# Altium PCB VGA.PcbDoc
Units mm, origin at the board's own origin, x right, y up, seen from the top; angles counter-clockwise.
Board outline 64.75 x 22.5 mm, 2 copper layers (Top Layer, Bottom Layer); 41 components, 26 nets, 139 pads, 0 vias.
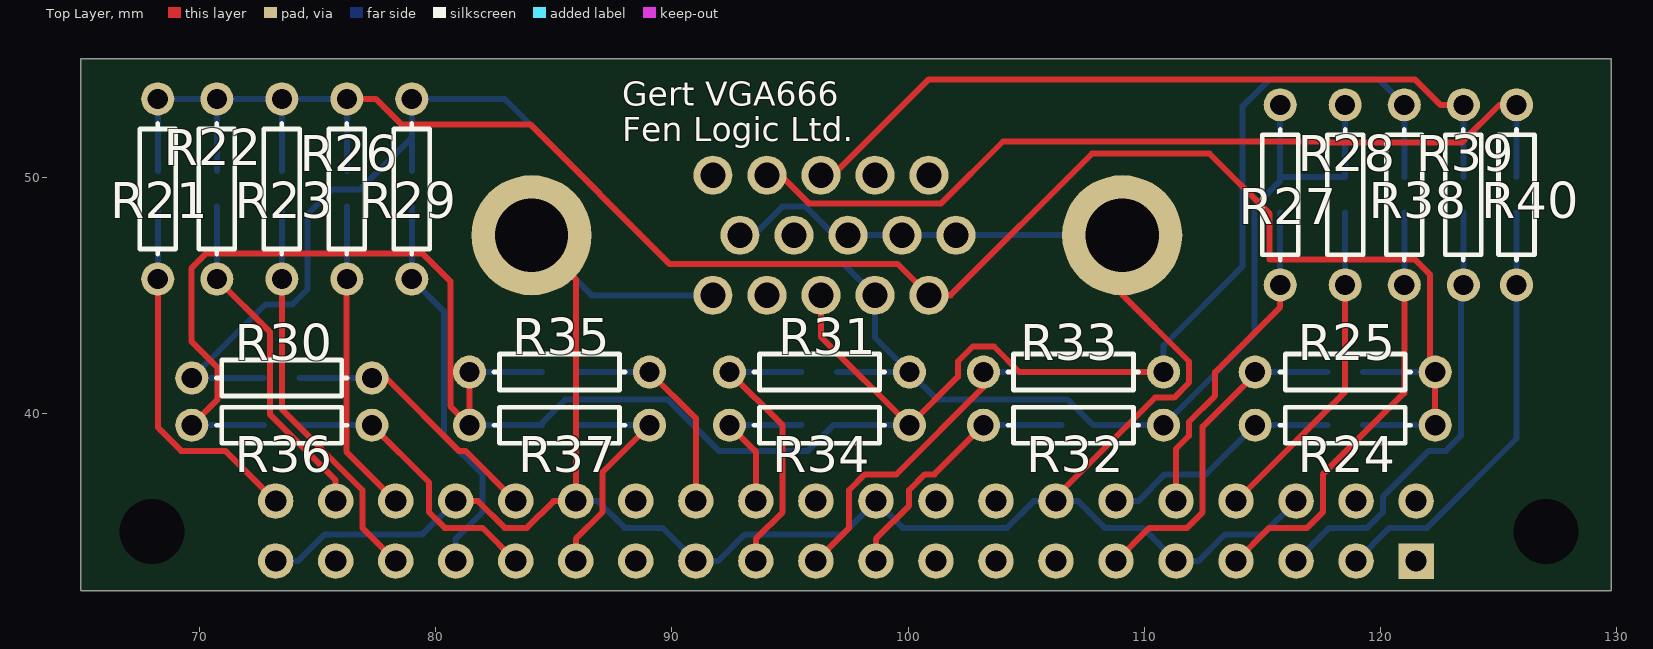
[diagram p0: Top Layer view]
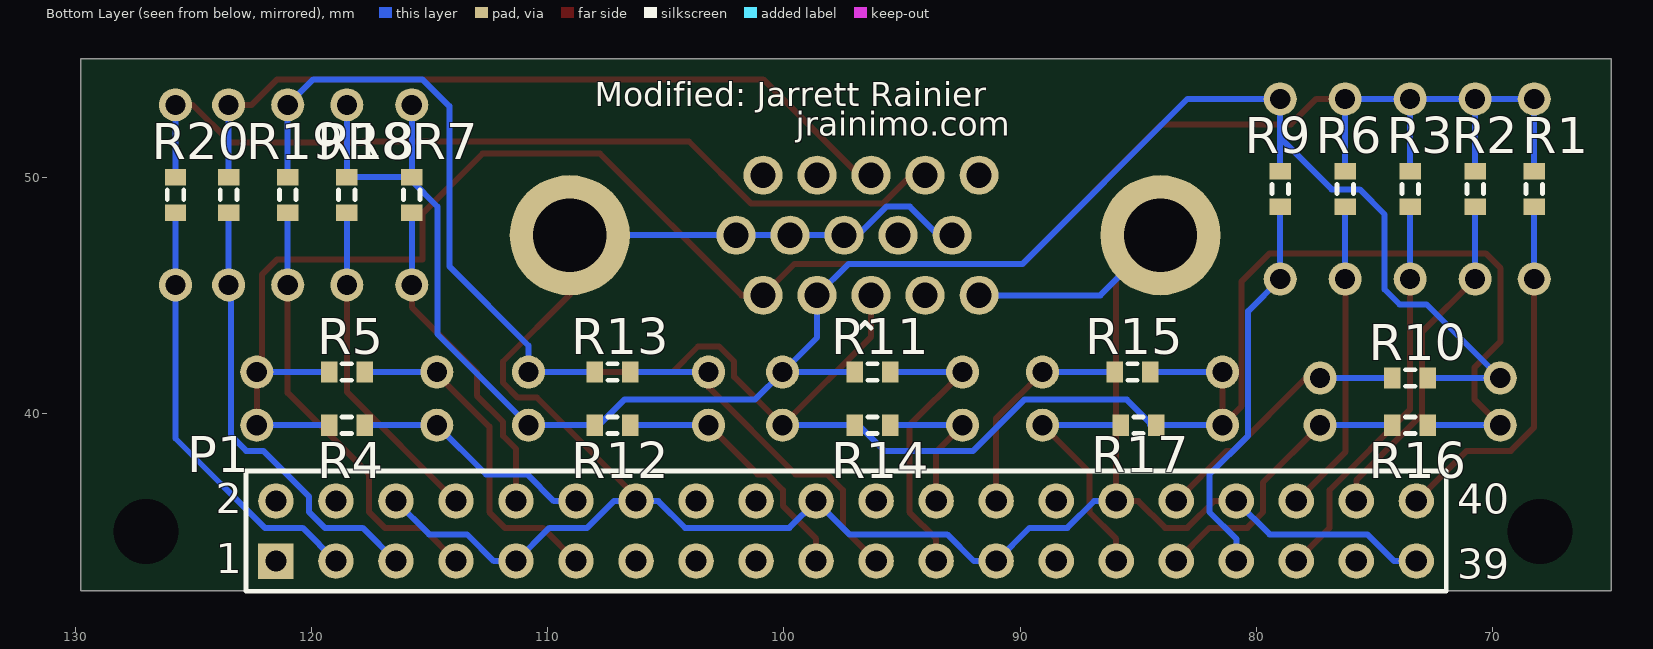
[diagram p1: Bottom Layer view, seen from below]

## Layer stack, top to bottom
Top Layer: signal copper 0.0356
Dielectric: dielectric 0.32, FR-4, Dk 4.8
Bottom Layer: signal copper 0.0356

## Board outline
65,32.5 65,55 129.75,55 129.75,32.5

## Design rules (kind name [scope] priority, off if disabled: settings)
Clearance [All] p1: gap=0.254
PolygonConnect [All] p1: connectstyle=Relief reliefconductorwidth=0.254 reliefentries=4 polygonreliefangle="90 Angle"
RoutingVias [All] p1: holewidth=0.711 width=1.27 viastyle="Through Hole" minholewidth=0.711 minwidth=1.27 maxholewidth=0.711 maxwidth=1.27
SilkscreenOverComponentPads [All] p1: minsilkscreentomaskgap=0.254
SolderMaskExpansion [All] p1: expansion=0.102
Width [All] p1: maxlimit=0.254 minlimit=0.254 preferedwidth=0.254
27 further rules are at their usual default settings.

## Components (designator, comment, footprint, x,y, rotation, side; value= is the part's Value field where it differs from the comment)
P1 "Header 20X2" HDR2X20 121.5,33.75 r180 bottom
R1 "Res3" J1-0603 68.25,49.5 r90 bottom
R2 "Res3" J1-0603 70.75,49.5 r90 bottom
R3 "Res3" J1-0603 73.5,49.5 r90 bottom
R4 "Res3" J1-0603 118.5,39.5 r0 bottom
R5 "Res3" J1-0603 118.5,41.75 r0 bottom
R6 "Res3" J1-0603 76.25,49.5 r90 bottom
R7 "Res3" J1-0603 115.75,49.25 r90 bottom
R8 "Res3" J1-0603 118.5,49.25 r90 bottom
R9 "Res3" J1-0603 79,49.5 r90 bottom
R10 "Res3" J1-0603 73.5,41.5 r180 bottom
R11 "Res3" J1-0603 96.25,41.75 r0 bottom
R12 "Res3" J1-0603 107.25,39.5 r0 bottom
R13 "Res3" J1-0603 107.25,41.75 r0 bottom
R14 "Res3" J1-0603 96.25,39.5 r0 bottom
R15 "Res3" J1-0603 85.25,41.75 r180 bottom
R16 "Res3" J1-0603 73.5,39.5 r180 bottom
R17 "Res3" J1-0603 85,39.5 r180 bottom
R18 "Res3" J1-0603 121,49.25 r90 bottom
R19 "Res3" J1-0603 123.5,49.25 r90 bottom
R20 "Res3" J1-0603 125.75,49.25 r90 bottom
R21 "Res1" AXIAL-0.3 68.25,49.5 r90 top
R22 "Res1" AXIAL-0.3 70.75,49.5 r90 top
R23 "Res1" AXIAL-0.3 73.5,49.5 r90 top
R24 "Res1" AXIAL-0.3 118.5,39.5 r0 top
R25 "Res1" AXIAL-0.3 118.5,41.75 r0 top
R26 "Res1" AXIAL-0.3 76.25,49.5 r90 top
R27 "Res1" AXIAL-0.3 115.75,49.25 r90 top
R28 "Res1" AXIAL-0.3 118.5,49.25 r90 top
R29 "Res1" AXIAL-0.3 79,49.5 r90 top
R30 "Res1" AXIAL-0.3 73.5,41.5 r180 top
R31 "Res1" AXIAL-0.3 96.25,41.75 r0 top
R32 "Res1" AXIAL-0.3 107,39.5 r0 top
R33 "Res1" AXIAL-0.3 107,41.75 r0 top
R34 "Res1" AXIAL-0.3 96.25,39.5 r0 top
R35 "Res1" AXIAL-0.3 85.25,41.75 r180 top
R36 "Res1" AXIAL-0.3 73.5,39.5 r180 top
R37 "Res1" AXIAL-0.3 85.25,39.5 r180 top
R38 "Res1" AXIAL-0.3 121,49.25 r90 top
R39 "Res1" AXIAL-0.3 123.5,49.25 r90 top
R40 "Res1" AXIAL-0.3 125.75,49.25 r90 top

## Footprints (in the part's own frame and the unit in brackets; to place one, negate y for a bottom-side part, rotate by r counter-clockwise, add the part's x,y. Pads: shape width x height; smd on the part's side, far side on the other; paste and mask are expansions set on the pad)
AXIAL-0.3 [mm] "Axial Device, Thru-Hole; 2 Leads; 0.3 in Pin Spacing"
  round 1.4 hole 0.85: 1(-3.81,0) 2(3.81,0)
  silkscreen extent -2.77,-0.76 2.77,0.76
HDR2X20 [mm] "Connector; Header; 20x2 Position"
  rect 1.5x1.5 hole 0.9: 1(0,0)
  round 1.5 hole 0.9: 2(0,2.54) 3(2.54,0) 4(2.54,2.54) 5(5.08,0) 6(5.08,2.54) 7(7.62,0) 8(7.62,2.54) 9(10.16,0) 10(10.16,2.54) 11(12.7,0) 12(12.7,2.54) 13(15.24,0) 14(15.24,2.54) 15(17.78,0) 16(17.78,2.54) 17(20.32,0) 18(20.32,2.54) 19(22.86,0) 20(22.86,2.54) 21(25.4,0) 22(25.4,2.54) 23(27.94,0) 24(27.94,2.54) 25(30.48,0) 26(30.48,2.54) 27(33.02,0) 28(33.02,2.54) 29(35.56,0) 30(35.56,2.54) 31(38.1,0) 32(38.1,2.54) 33(40.64,0) 34(40.64,2.54) 35(43.18,0) 36(43.18,2.54) 37(45.72,0) 38(45.72,2.54) 39(48.26,0) 40(48.26,2.54)
  silkscreen extent -1.27,-1.27 49.53,3.81
J1-0603 [mm] "Chip Resistor, Body 1.6x0.8mm, IPC High Density"
  rect 0.7x0.9 smd: 1(-0.75,0) 2(0.75,0)
  silkscreen extent -0.2,-0.35 0.2,0.35, body extent -0.85,-0.48 0.85,0.48, height 0.9

## Part data
P1: "Header, 20-Pin, Dual row"
R1 R2 R3 R4 R5 R6 R7 R8 R9 R10 R11 R12 R13 R14 R15 R16 R17 R18 R19 R20 R21 R22 R23 R24 R25 R26 R27 R28 R29 R30 R31 R32 R33 R34 R35 R36 R37 R38 R39 R40: "Resistor"

## Free pads (board coordinates)
  round 1.524 hole 2.75: 0(68,35) 0(127,35)
  round 1.651 hole 1.067: 1(100.886,45) 2(98.6,45) 3(96.314,45) 4(94.028,45) 5(91.742,45) 6(102.029,47.54) 7(99.743,47.54) 8(97.457,47.54) 9(95.171,47.54) 10(92.885,47.54) 11(100.886,50.08) 12(98.6,50.08) 13(96.314,50.08) 14(94.028,50.08) 15(91.742,50.08)
  round 5.08 hole 3.099: 16(84.071,47.54) 17(109.065,47.54)

## Nets (pads, with @x,y where several pads share a name; then routed paths per layer and width w, separated by ;. In a path a pad name is that pad's centre, name@x,y a point inside that pad or via, vN(x,y) a via of type N, cw(c..) or ccw(c..) an arc to the next point about the centre after c; other vN are vias at no path point)
BLUE: pad.3 R13.2 R14.2 R15.2 R16.2 R17.2 R18.2 R33.2 R34.2 R35.2 R36.2 R37.2 R38.2 | length 103.9
  Top Layer w0.254: R36.2 70.771,40.581 70.771,41.948 69.669,43.05 69.669,46.138 70.302,46.771 79.448,46.771 80.63,45.589 80.63,40.31 R37.2 R35.2 ; pad.3 96.314,43.246 R34.2 102.109,41.549 102.109,42.198 102.742,42.831 103.638,42.831 104.719,41.75 R33.2
  Bottom Layer w0.254: R36.2 R16.2 ; R37.2 R17.2@84.411,39.5 ; R35.2 R15.2 ; R17.2@84.5,39.5 R17.2@84.411,39.5 ; R14.2 R34.2 96.839,39.5 95.758,38.419 91.992,38.419 89.83,40.581 85.492,40.581 R17.2@84.411,39.5 ; R13.2 R33.2 110.81,42.87 114.161,46.221 114.161,53 115.302,54.141 118.052,54.141 119.919,54.141 R38.2 R18.2
BLUE2: P1.7 R18.1 R38.1 | length 18.6
  Top Layer w0.254: P1.7 115.289,35.159 116.888,35.159 117.551,35.822 117.551,37.421 121,40.87 R38.1
  Bottom Layer w0.254: R38.1 R18.1
BLUE3: P1.29 R17.1 R37.1 | length 10.1
  Top Layer w0.254: P1.29 85.94,34.691 87.071,35.822 87.071,37.511 R37.1
  Bottom Layer w0.254: R17.1@86,39.5 R37.1
BLUE4: P1.31 R16.1 R36.1 | length 12.3
  Top Layer w0.254: R36.1 79.729,37.081 79.729,35.822 80.392,35.159 81.991,35.159 P1.31
  Bottom Layer w0.254: R16.1 R36.1
BLUE5: P1.26 R15.1 R35.1 | length 9.3
  Top Layer w0.254: R35.1 91.02,39.79 P1.26
  Bottom Layer w0.254: R15.1 R35.1
BLUE6: P1.24 R14.1 R34.1 | length 6.7
  Top Layer w0.254: R34.1 93.56,38.38 P1.24
  Bottom Layer w0.254: R34.1 R14.1
BLUE7: P1.21 R13.1 R33.1 | length 14.4
  Top Layer w0.254: P1.21 97.509,35.159 97.509,36.758 98.172,37.421 99.51,37.421 R33.1@103.19,41.101
  Bottom Layer w0.254: R33.1 R13.1
GND: P1.6 P1.9 P1.14 P1.20 P1.25 P1.30 P1.34 P1.39 pad.5 pad.6 pad.7 pad.8 pad.10 pad.16 pad.17 | length 102.8
  Top Layer w0.254: P1.34 81.801,36.29 82.932,35.159 83.868,35.159 84.999,36.29 P1.30 85.94,45.671 pad.16 ; P1.14@106.26,36.479 110.45,40.669 111.258,40.669 111.891,41.302 111.891,42.198 109.065,45.024 pad.17
  Bottom Layer w0.254: P1.39 74.181,33.75 75.312,34.881 79.451,34.881 P1.34 ; pad.16 86.611,45 pad.5 ; P1.30 86.881,36.29 88.012,35.159 89.611,35.159 P1.25 91.961,33.75 93.092,34.881 97.231,34.881 P1.20 99.771,35.159 104.188,35.159 105.319,36.29 P1.14 107.201,36.29 108.332,35.159 109.931,35.159 P1.9 112.281,33.75 113.412,34.881 115.011,34.881 P1.6 ; pad.10 93.465,47.54 94.671,48.746 95.671,48.746 96.877,47.54 pad.8 pad.7 ; pad.7@100.251,47.54 pad.6 pad.17
GREEN: pad.2 R7.2 R8.2 R9.2 R10.2 R11.2 R12.2 R27.2 R28.2 R29.2 R30.2 R31.2 R32.2 | length 90.4
  Bottom Layer w0.254: R10.2 R30.2 72.799,44.609 73.948,44.609 74.581,45.242 74.581,48.42 75.642,49.481 76.82,49.481 79,51.661 ; R9.2 79,51.661 ; R11.2 R31.2 ; R12.2 R32.2 ; R28.2 R8.2 R7.2 ; 79,51.661 R29.2 82.924,53.31 89.901,46.333 97.267,46.333 pad.2 98.6,43.21 R31.2 ; R31.2 101.229,40.581 106.758,40.581 107.839,39.5 R32.2 ; R32.2 114.669,43.359 114.669,48.758 115.75,49.839 R7.2 ; R7.2 R27.2 R7.2
GREEN2: P1.19 R12.1 R32.1 | length 11.2
  Top Layer w0.254: P1.19 98.64,34.691 100.049,36.1 100.049,36.758 100.712,37.421 101.111,37.421 R32.1
  Bottom Layer w0.254: R32.1 R12.1
GREEN3: P1.23 R11.1 R31.1 | length 12.5
  Top Layer w0.254: R31.1 94.691,39.499 94.691,35.822 93.56,34.691 P1.23
  Bottom Layer w0.254: R31.1 R11.1
GREEN4: P1.32 R10.1 R30.1 | length 10.7
  Top Layer w0.254: R30.1@77.911,41.5 80.992,38.419 81.271,38.419 P1.32
  Bottom Layer w0.254: R10.1 R30.1
GREEN5: P1.33 R9.1 R29.1 | length 16.7
  Bottom Layer w0.254: R9.1 R29.1 80.359,44.331 80.359,39.052 81.991,37.42 81.991,35.822 80.86,34.691 P1.33
GREEN6: P1.8 R8.1 R28.1 | length 14.1
  Top Layer w0.254: P1.8 118.5,40.91 R28.1
  Bottom Layer w0.254: R28.1 R8.1
GREEN7: P1.10 R7.1 R27.1 | length 14
  Top Layer w0.254: P1.10 111.34,38.501 111.891,39.052 111.891,39.641 113,40.75 113,41.75 115.75,44.5 R27.1
  Bottom Layer w0.254: R27.1 R7.1
HSYNC: pad.13 R19.2 R39.2 | length 32.4
  Top Layer w0.254: pad.13 96.822,50.08 100.883,54.141 121.448,54.141 122.529,53.06 R39.2
  Bottom Layer w0.254: R19.2 R39.2
PI_HSYNC: P1.5 R19.1 R39.1 | length 19
  Bottom Layer w0.254: P1.5 117.829,35.159 119.428,35.159 120.091,35.822 120.091,36.48 122.03,38.419 122.758,38.419 123.391,39.052 123.391,45.331 R39.1 R19.1
PI_VSYNC: P1.3 R20.1 R40.1 | length 18.5
  Bottom Layer w0.254: P1.3 120.369,35.159 121.968,35.159 125.75,38.941 R40.1 R20.1
RED: pad.1 R1.2 R2.2 R3.2 R4.2 R5.2 R6.2 R21.2 R22.2 R23.2 R24.2 R25.2 R26.2 | length 87.5
  Top Layer w0.254: R26.2 77.471,53.31 78.552,52.229 84.005,52.229 89.901,46.333 99.553,46.333 pad.1 101.793,45 107.794,51 112.75,51 115.302,48.448 115.302,46.521 121.448,46.521 122.081,45.888 R25.2@122.081,41.979 ; R24.2 R25.2
  Bottom Layer w0.254: R1.2 R21.2 R22.2 ; R2.2 R22.2 ; R3.2 R23.2 ; R6.2 R26.2 R23.2 ; R4.2 R24.2 ; R5.2 R25.2 ; R22.2 R23.2
RED2: P1.36 R6.1 R26.1 | length 13.3
  Top Layer w0.254: R26.1@76.229,45.669 76.229,38.381 P1.36
  Bottom Layer w0.254: R26.1 R6.1
RED3: P1.11 R5.1 R25.1 | length 14.3
  Top Layer w0.254: P1.11 110.209,35.159 111.808,35.159 112.471,35.822 112.471,39.443 R25.1@114.69,41.662
  Bottom Layer w0.254: R25.1 R5.1
RED4: P1.12 R4.1 R24.1 | length 10.3
  Bottom Layer w0.254: P1.12 109.741,36.29 110.872,37.421 112.611,37.421 R24.1 R4.1
RED5: P1.35 R3.1 R23.1 | length 17
  Top Layer w0.254: R23.1 73.5,40.169 76.911,36.758 76.911,35.159 P1.35
  Bottom Layer w0.254: R23.1 R3.1
RED6: P1.38 R2.1 R22.1 | length 14.5
  Top Layer w0.254: R22.1 72.992,43.448 72.992,39.959 75.78,37.171 P1.38
  Bottom Layer w0.254: R22.1 R2.1
RED7: P1.40 R1.1 R21.1 | length 15.6
  Top Layer w0.254: R21.1 68.25,39.411 69.242,38.419 71.111,38.419 P1.40
  Bottom Layer w0.254: R21.1 R1.1
VSYNC: pad.14 R20.2 R40.2 | length 36.5
  Top Layer w0.254: pad.14@94.608,50.08 95.814,48.873 101.386,48.873 104.02,51.508 117.805,51.508 117.842,51.471 123.44,51.471 125.029,53.06 R40.2
  Bottom Layer w0.254: R20.2 R40.2
pads on no net: P1.1 P1.2 P1.4 P1.13 P1.15 P1.16 P1.17 P1.18 P1.22 P1.27 P1.28 P1.37

## Silkscreen, mask and mechanical layers (free items; w line width, h text height)
Top Overlay:
  text "Gert VGA666" at 87.904,53.02 h1.02
  text "Fen Logic Ltd." at 87.904,51.52 h1.02
Bottom Overlay:
  lines w0.203: 96.314,43.603 96.568,43.857 96.822,43.603
  text "Modified: Jarrett Rainier" at 108,53 h1.02
  text "jrainimo.com" at 99.5,51.75 h1.02
Mechanical 1:
  circle w0.203: c109.065,47.616 r1.591
  circle w0.203: c84.071,47.616 r1.591
  circle w0.203: c84.071,47.616 r2.344
  circle w0.203: c109.09,47.616 r2.344
  lines w0.203: 95.806,43.603 96.568,44.365 97.33,43.603
Mechanical 15:
  circle w0.051: c109.09,47.616 r2.344
  circle w0.051: c84.071,47.616 r2.344
  circle w0.051: c84.071,47.616 r1.591
  circle w0.051: c109.065,47.616 r1.591
  lines w0.051: 95.806,43.603 96.568,44.365 97.33,43.603

## Text inside footprints (layer, text, board x,y; h text height)
P1: Bottom Overlay "1" at 124.04,33.242 h1.27; Bottom Overlay "2" at 124.04,35.782 h1.27; Bottom Overlay "40" at 71.5,35.75 h1.27; Bottom Overlay "39" at 71.5,33 h1.27